# Altium PCB Electronic_dc_load_v2.PcbDoc (part 1 of 2)
Units mil, origin at the board's own origin, x right, y up, seen from the top; angles counter-clockwise.
Board outline 20669.29 x 4035.43 mil, 2 copper layers (Top Layer, Bottom Layer); 130 components, 99 nets, 414 pads, 0 vias.
Unrouted connection lines stored in the file: 291.
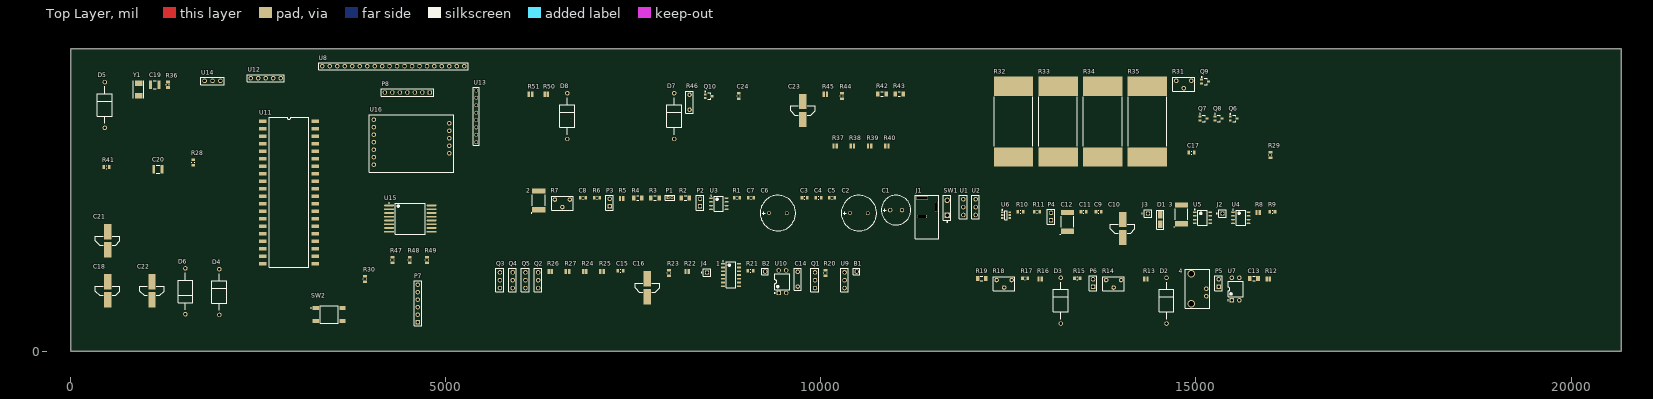
[diagram p0: Top Layer view]
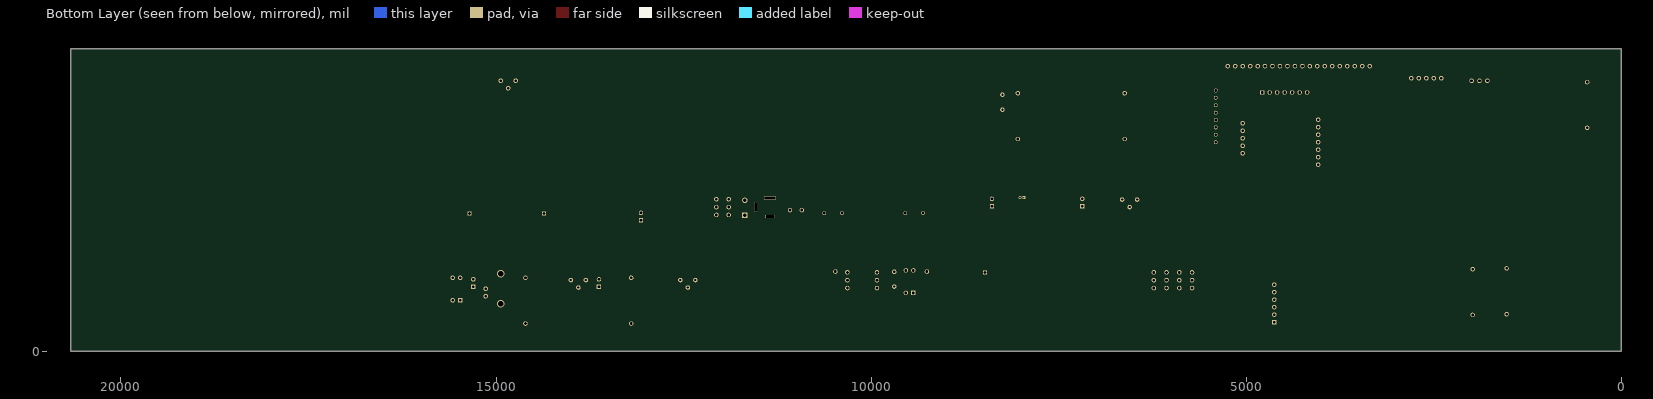
[diagram p1: Bottom Layer view, seen from below]

## Layer stack, top to bottom
Top Solder: solder mask 0.4, Solder Resist, Dk 3.5
Top Layer: signal copper 1.4
Dielectric 1: dielectric 12.6, FR-4, Dk 4.8
Bottom Layer: signal copper 1.4
Bottom Solder: solder mask 0.4, Solder Resist, Dk 3.5

## Board outline
0,0 20669.29,0 20669.29,4035.43 0,4035.43

## Design rules (kind name [scope] priority, off if disabled: settings)
Clearance [All] p1: gap=10 ignorepadtopadclearanceinfootprint=FALSE except(0: Arc-Hole Track-Hole SMDPad-Hole THPad-Hole Via-Hole Fill-Hole Poly-Hole Region-Hole Text-Hole)
PolygonConnect [All] p1: connectstyle=Relief reliefconductorwidth=10 reliefentries=4 polygonreliefangle="90 Angle" airgapwidth=10
RoomDefinition electronic_dc_load_v1 [InComponentClass('electronic_dc_load_v1')] p1: confinementstyle=ConfineIn formatcopy=TRUE lockcomponents=FALSE outline 0,0 20669.29,0 20669.29,4035.43 0,4035.43
RoutingVias [All] p1: holewidth=28 width=50 viastyle="Through Hole" minholewidth=28 minwidth=50 maxholewidth=28 maxwidth=50
SolderMaskExpansion [All] p1: expansion=4 istentingtop=FALSE
Width [All] p1: maxlimit=10 minlimit=10 preferedwidth=10
30 further rules are at their usual default settings.

## Components (designator, comment, footprint, x,y, rotation, side; value= is the part's Value field where it differs from the comment)
1 "AD8630" SOIC127P600X265-14N 8801.57,1020.39 r0 top
2 "100uF Tant." "CAPCP7343X24N-100uf Tant." 6238.58,2015 r90 top
3 "100uF Tant." "CAPCP7343X24N-100uf Tant." 14807.8,1827.8 r90 top
4 "031-71052" PNC-031-71052 15137.95,736.97 r90 top
B1 "BANANA JACK" TP 10476.57,1065.39 r0 top
B2 "BANANA JACK" TP 9256.57,1065.39 r0 top
C1 "47μF" Capacitor-47uf 10923.58,1885 r0 top
C2 "470μF" Capacitor-470uf 10388.58,1845 r0 top
C3 "0.1uF" RESC2012X06N 9783.58,2050 r0 top
C4 "0.1uF" RESC2012X06N 9968.58,2050 r0 top
C5 "0.1uF" RESC2012X06N 10148.58,2050 r0 top
C6 "220μF" Capacitor-470uf 9308.58,1845 r0 top
C7 "0.1uF" RESC2012X06N 9068.58,2050 r0 top
C8 "0.1uF" RESC2012X06N 6828.58,2050 r0 top
C9 "0.1uF" RESC2012X06N 13702.8,1862.8 r0 top
C10 "100uF Elect." CAPAE9183X102M 14022.8,1637.8 r90 top
C11 "0.1uF" RESC2012X06N 13502.8,1862.8 r0 top
C12 "100uF Tant." "CAPCP7343X24N-100uf Tant." 13287.8,1727.8 r90 top
C13 "1uF" RESC3216X06N 15772.95,971.97 r0 top
C14 "1nf" R82EC1100AA50J 9691.57,865.39 r90 top
C15 "0.1uF" RESC2012X06N 7326.57,1075.39 r0 top
C16 "100uF Elect." CAPAE9183X102M 7686.57,850.39 r90 top
C17 "0.1uF" RESC2012X06N 14941.77,2650.2 r0 top
C18 "100uF Elect." CAPAE9183X102M 492.13,809.06 r90 top
C19 "22pF" CAPC3028X26N 1119.33,3556.22 r0 top
C20 "22pF" CAPC3028X26N 1162.76,2427.28 r0 top
C21 "100uF Elect." CAPAE9183X102M 492.13,1476.38 r90 top
C22 "100uF Elect." CAPAE9183X102M 1082.68,809.06 r90 top
C23 "100uF Elect." CAPAE9183X102M 9759.33,3212.6 r90 top
C24 "0.1uF" RESC2012X06N 8904.33,3407.6 r90 top
D1 "15-21SURC/S530-A3/TR8" Diode 14522.8,1757.8 r90 top
D2 "D" "Diode_Through hole" 14607.95,371.97 r90 top
D3 "D" "Diode_Through hole" 13197.95,371.97 r90 top
D4 "D" "Diode_Through hole" 1981.3,487.2 r90 top
D5 "D" "Diode_Through hole" 454.33,2981.22 r90 top
D6 "D" "Diode_Through hole" 1528.54,1107.28 r270 top
D7 "D" "Diode_Through hole" 8044.33,2832.6 r90 top
D8 "D" "Diode_Through hole" 6619.33,2832.6 r90 top
J1 "Power jack" "DC jack" 11348.58,1800 r90 top
J2 "TSW-101-24-T-S" SAMTEC_TSW-101-24-T-S 15352.8,1837.8 r0 top
J3 "TSW-101-24-T-S" SAMTEC_TSW-101-24-T-S 14357.8,1837.8 r0 top
J4 "TSW-101-24-T-S" SAMTEC_TSW-101-24-T-S 8481.57,1050.39 r0 top
P1 "MHDR1X2" MHDR1X2 7963.58,2050 r0 top
P2 "Header 2" HDR1X2 8388.58,1935 r90 top
P3 "Header 2" HDR1X2 7183.58,1935 r90 top
P4 "Header 2" HDR1X2 13067.8,1747.8 r90 top
P5 "Header 2" HDR1X2 15302.95,861.97 r90 top
P6 "Fan" HDR1X2 13627.95,861.97 r90 top
P7 "Pickit" HDR1X6 4625.98,390.55 r90 top
P8 "Header 7" HDR1X7 4787.2,3452.76 r180 top
Q1 "STP55NF06L" TO-220-3 9921.57,845.39 r90 top
Q2 "STP55NF06L" TO-220-3 6231.57,845.39 r90 top
Q3 "STP55NF06L" TO-220-3 5721.57,845.39 r90 top
Q4 "STP55NF06L" TO-220-3 5891.57,845.39 r90 top
Q5 "STP55NF06L" TO-220-3 6061.57,845.39 r90 top
Q6 "BC846BWT1G" SOT65P245X110-3N 15503.43,3107.32 r0 top
Q7 "BC846BWT1G" SOT65P245X110-3N 15098.43,3107.32 r0 top
Q8 "BC846BWT1G" SOT65P245X110-3N 15298.43,3107.32 r0 top
Q9 "BC846BWT1G" SOT65P245X110-3N 15122.4,3599.45 r0 top
Q10 "BC846BWT1G" SOT65P245X110-3N 8504.33,3402.6 r0 top
R1 "10kR" RESC2012X06N 8883.58,2050 r0 top
R2 "1M" RESC3216X06N 8193.58,2045 r0 top
R3 "1M" RESC3216X06N 7788.58,2045 r0 top
R4 "1M" RESC3216X06N 7558.58,2045 r0 top
R5 "100R" RESC1418X06N 7343.58,2040 r0 top
R6 "10k" RESC2012X06N 7013.58,2050 r0 top
R7 "20k" 3296Y_Trimmer 6453.58,2025 r0 top
R8 "2.2KR" RESC1418X06N 15827.8,1852.8 r0 top
R9 "10kR" RESC2012X06N 16017.8,1862.8 r0 top
R10 "10k" RESC2012X06N 12662.8,1862.8 r0 top
R11 "10k" RESC2012X06N 12882.8,1862.8 r0 top
R12 "100R" RESC1418X06N 15962.95,966.97 r0 top
R13 "47KR" RESC1418X06N 14332.95,966.97 r0 top
R14 "500k" 3296Y_Trimmer 13802.95,951.97 r0 top
R15 "10k" RESC2012X06N 13417.95,976.97 r0 top
R16 "2.2KR" RESC1418X06N 12922.95,966.97 r0 top
R17 "1kR" RESC2012X06N 12722.95,976.97 r0 top
R18 "20k" 3296Y_Trimmer 12342.95,951.97 r0 top
R19 "4.7M" RESC3216X06N 12142.95,971.97 r0 top
R20 "1kR" RESC2012X06N 10061.57,1045.39 r90 top
R21 "1kR" RESC2012X06N 9061.57,1075.39 r0 top
R22 "100R" RESC1418X06N 8216.57,1065.39 r0 top
R23 "10k" RESC2012X06N 7976.57,1045.39 r90 top
R24 "2.2KR" RESC1418X06N 6851.57,1065.39 r0 top
R25 "2.2KR" RESC1418X06N 7081.57,1065.39 r0 top
R26 "2.2KR" RESC1418X06N 6391.57,1065.39 r0 top
R27 "2.2KR" RESC1418X06N 6621.57,1065.39 r0 top
R28 "1kR" RESC2012X06N 1633.19,2518.82 r90 top
R29 "1kR" RESC2012X06N 15991.77,2620.2 r90 top
R30 "10kR" RESC2012X06N 3923.9,965.67 r90 top
R31 "200R" 3296Y_Trimmer 14737.4,3609.45 r0 top
R32 "1R" RESC296132X130N 12567.4,3064.45 r90 top
R33 "1R" RESC296132X130N 13162.4,3064.45 r90 top
R34 "1R" RESC296132X130N 13757.4,3064.45 r90 top
R35 "1R" RESC296132X130N 14352.4,3064.45 r90 top
R36 "1kR" RESC2012X06N 1294.33,3556.22 r90 top
R37 "270KR" RESC1418X06N 10188.98,2738.62 r0 top
R38 "270KR" RESC1418X06N 10418.98,2738.62 r0 top
R39 "270KR" RESC1418X06N 10648.98,2738.62 r0 top
R40 "270KR" RESC1418X06N 10878.98,2738.62 r0 top
R41 "1kR" RESC2012X06N 477.76,2457.28 r0 top
R42 "1M" RESC3216X06N 10814.33,3432.6 r0 top
R43 "1M" RESC3216X06N 11044.33,3432.6 r0 top
R44 "10k" RESC2012X06N 10279.33,3407.6 r90 top
R45 "100R" RESC1418X06N 10059.33,3427.6 r0 top
R46 "0.1R" "TO-220 - 2 PIN" 8249.33,3222.6 r90 top
R47 "10kR" RESC2012X06N 4288.66,1217.64 r90 top
R48 "10kR" RESC2012X06N 4518.66,1217.64 r90 top
R49 "10kR" RESC2012X06N 4748.66,1217.64 r90 top
R50 "330KR" RESC1418X06N 6339.33,3427.6 r0 top
R51 "100KR" RESC1418X06N 6129.33,3427.6 r0 top
SW1 "SW-SPST" SPST-2 11683.58,1915 r90 top
SW2 "FSM4JSMA" TE_FSM4JSMA 3444.88,492.13 r0 top
U1 "LM7812CT" TO-220-3 11898.58,1820 r90 top
U2 "LM7805CT" TO-220-3 12063.58,1820 r90 top
U3 "OPA277" SOIC127P600X265-8L 8638.58,1970 r0 top
U4 "LM431ACMX" SOIC127P600X265-8L 15597.8,1782.8 r0 top
U5 "LTC1046" SOIC127P600X265-8L 15087.8,1782.8 r0 top
U6 "SN74LVC2G14DBVR" SOT95P245X110-6N 12467.8,1817.8 r0 top
U7 "Optoisolator1" DIP-4 15527.95,831.97 r90 top
U8 "GLCD" "20 PIN- 2.54mm" 5246.26,3804.13 r180 top
U9 "MBR41H100CTG" TO-220-3 10316.57,845.39 r90 top
U10 "Optoisolator1" DIP-4 9486.57,930.39 r90 top
U11 "PIC16F1779" "DIP40 - duplicate" 2559.06,3070.08 r0 top
U12 "Rotary Encoder Module" "5 PIN-2.54mm" 2398.82,3642.72 r0 top
U13 "27899" "8 pin component_2.54mm pitch" 5405.51,2790.35 r90 top
U14 "LM35DZ" TO-220-3 1994.49,3608.27 r180 top
U15 "PCF8574ADWR" SOIC127P1650X265-16L 4527.56,1771.65 r0 top
U16 "DS1307-Tiny RTC Modul" "DS1307-Tiny RTC Modul" 5047.32,3041.54 r180 top
Y1 "ABM7-16.000MHZ-D2Y-T" XTAL_ABM7-16.000MHZ-D2Y-T 904.33,3491.22 r90 top

## Footprints (in the part's own frame and the unit in brackets; to place one, negate y for a bottom-side part, rotate by r counter-clockwise, add the part's x,y. Pads: shape width x height; smd on the part's side, far side on the other; paste and mask are expansions set on the pad)
"5 PIN-2.54mm" [mil]
  round 60 hole 35.43: 1(0,0) 2(100,0) 3(200,0) 4(300,0) 5(400,0)
  silkscreen extent -47,-49 450,48
"8 pin component_2.54mm pitch" [mm]
  round 1.3 hole 0.9: 1(0,0) 2(2.5,0) 3(5,0) 4(7.5,0) 5(10,0) 6(12.5,0) 7(15,0) 8(17.5,0)
  silkscreen extent -1.1,-0.97 18.6,1
"20 PIN- 2.54mm" [mil]
  round 60 hole 35.43: 1(0,0) 2(100,0) 3(200,0) 4(300,0) 5(400,0) 6(496.85,0) 7(596.85,0) 8(696.85,0) 9(796.85,0) 10(896.85,0) 11(996.85,0) 12(1095.28,0) 13(1193.7,0) 14(1293.7,0) 15(1393.7,0) 16(1493.7,0) 17(1593.7,0) 18(1693.7,0) 19(1793.7,0) 20(1893.7,0)
  silkscreen extent -52,-45 1942,46
3296Y_Trimmer [mil] "3296Y_Trimmer"
  round 60 hole 30: 1(0,0) 2(100,-100) 3(200,0)
  silkscreen extent -44,-143 244,46
Capacitor-47uf [mm]
  round 1.5 hole 0.9: 1(0,0) 2(4,0)
  silkscreen extent -3,-5 7,5
Capacitor-470uf [mm]
  round 1.3 hole 0.9: 1(0,0) 2(6,0)
  silkscreen extent -3,-6 9,6
CAPAE9183X102M [mm] "Aluminum Electrolytic Capacitor, Body 3.10x8.30x10.20mm, IPC Low Density"
  rect 5.15x2.45 smd: 1(-3.05,0) 2(3.05,0)
  silkscreen extent -1.55,-4.15 1.55,4.15, body extent -2.25,-4.15 2.25,4.15, height 10.2
CAPC3028X26N [mm] "Chip Capacitor, 2-Leads, Body 2.98x2.79mm, IPC Medium Density"
  rect 1x2.95 smd: 1(-1.425,0) 2(1.425,0)
  silkscreen extent -0.55,-1.37 0.55,1.38, body extent -1.49,-1.39 1.49,1.4, height 2.59
"CAPCP7343X24N-100uf Tant." [mm] "Chip Capacitor, 2-Leads, Body 7.30x4.30mm, IPC Medium Density"
  rect 1.8x4.45 smd: 1(-3.175,0) 2(3.175,0)
  silkscreen extent -4.34,-2.12 1.9,2.49, body extent -3.65,-2.15 3.65,2.15, height 2.4
"DC jack" [mm] "KLDHCX-0202-AC-1"
  rect 1.2x3.7 hole 3.5 slot 1 at 0 deg: 1(6.25,0)
  rect 1x3.2 hole 3 slot 0.8 at 0 deg: 2(0,0)
  rect 3.2x1 hole 3 slot 0.8 at 90 deg: 3(3.25,-4.8)
  silkscreen extent -7.49,-5.72 7.14,2.24
Diode [mm]
  rect 2.5x1.6 smd: 1(-1.6,0) 2(1.6,0)
  silkscreen extent -3.33,-1.24 3.63,1.19
"Diode_Through hole" [mm]
  round 1.5 hole 0.9: A(0,0) K(15.5,0)
  silkscreen extent 1.5,-2.5 14,2.5
"DIP40 - duplicate" [mm]
  rect 2.54x1.27 smd: 1(0,0) 2(0,-2.54) 3(0,-5.08) 4(0,-7.62) 5(0,-10.16) 6(0,-12.7) 7(0,-15.24) 8(0,-17.78) 9(0,-20.32) 10(0,-22.86) 11(0,-25.4) 12(0,-27.94) 13(0,-30.48) 14(0,-33.02) 15(0,-35.56) 16(0,-38.1) 17(0,-40.64) 18(0,-43.18) 19(0,-45.72) 20(0,-48.26) 21(17.78,-48.26) 22(17.78,-45.72) 23(17.78,-43.18) 24(17.78,-40.64) 25(17.78,-38.1) 26(17.78,-35.56) 27(17.78,-33.02) 28(17.78,-30.48) 29(17.78,-27.94) 30(17.78,-25.4) 31(17.78,-22.86) 32(17.78,-20.32) 33(17.78,-17.78) 34(17.78,-15.24) 35(17.78,-12.7) 36(17.78,-10.16) 37(17.78,-7.62) 38(17.78,-5.08) 39(17.78,-2.54)
  rect 2.5x1.27 smd: 40(17.78,0)
  silkscreen extent 2.16,-49.53 15.62,1.27
DIP-4 [mm] "DIP; 4 Leads; Row Spacing 7.62 mm; Pitch 2.54 mm"
  rect 1.5x1.5 hole 0.9: 1(-3.81,1.27)
  round 1.5 hole 0.9: 2(-3.81,-1.27) 3(3.81,-1.27) 4(3.81,1.27)
  silkscreen extent -3.93,-2.55 2.65,2.69, body extent -3.15,-2.5 3.15,2.5, height 5.6
"DS1307-Tiny RTC Modul" [mil]
  round 60 hole 35.43: 1(1006,-49.21) 2(1005.98,50.79) 3(1005.98,150.79) 4(1005.98,250.79) 5(1005.98,350.79) 6(1005.98,450.79) 7(1005.98,550.79) 8(0,400) 9(0,300) 10(0,200) 11(0,100) 12(0,0)
  silkscreen extent -57,-117 1066,654
HDR1X2 [mm] "Connector; Header; 2 Position"
  rect 1.5x1.5 hole 0.9: 1(0,0)
  round 1.5 hole 0.9: 2(2.54,0)
  silkscreen extent -1.27,-1.27 3.81,1.27
HDR1X6 [mm] "Connector; Header; 6 Position"
  rect 1.5x1.5 hole 0.9: 1(0,0)
  round 1.5 hole 0.9: 2(2.54,0) 3(5.08,0) 4(7.62,0) 5(10.16,0) 6(12.7,0)
  silkscreen extent -1.27,-1.27 13.97,1.27
HDR1X7 [mm] "Connector; Header; 7 Position"
  rect 1.5x1.5 hole 0.9: 1(0,0)
  round 1.5 hole 0.9: 2(2.54,0) 3(5.08,0) 4(7.62,0) 5(10.16,0) 6(12.7,0) 7(15.24,0)
  silkscreen extent -1.27,-1.27 16.51,1.27
MHDR1X2 [mm] "Connector; Header; 2 Position"
  rect 1x1 hole 0.6: 1(0,0)
  round 1 hole 0.6: 2(1.27,0)
  silkscreen extent -0.9,-0.9 2.17,0.9
PNC-031-71052 [mm]
  round 1.524 hole 0.9: 1(2.54,0) 2(0,0)
  round 2.5 hole 1.8: 3(7.62,5.08) 4(-2.54,5.08)
  silkscreen extent -4.06,-1.14 9.19,7.06
R82EC1100AA50J [mil]
  round 60 hole 30: 1(0,0) 2(196.85,0)
  silkscreen extent -46,-44 244,45
RESC1418X06N [mm] "Chip Resistor, 2-Leads, Body 1.45x1.75mm, IPC Medium Density"
  rect 0.8x1.8 smd: 1(-0.55,0) 2(0.55,0)
  body extent -0.72,-0.87 0.73,0.87, height 0.6
RESC2012X06N [mm] "Chip Resistor, 2-Leads, Body 2.00x1.25mm, IPC Medium Density"
  rect 0.9x1.3 smd: 1(-0.925,0) 2(0.925,0)
  silkscreen extent -0.1,-0.55 0.1,0.55, body extent -1,-0.63 1,0.63, height 0.6
RESC3216X06N [mm] "Chip Resistor, 2-Leads, Body 3.20x1.60mm, IPC Medium Density"
  rect 1.2x1.65 smd: 1(-1.375,0) 2(1.375,0)
  silkscreen extent -0.4,-0.72 0.4,0.72, body extent -1.6,-0.8 1.6,0.8, height 0.55
RESC296132X130N [mm] "Chip Resistor, 2-Leads, Body 29.59x13.21mm, IPC Medium Density"
  rect 6.45x13.3 smd: 1(-11.975,0) 2(11.975,0)
  silkscreen extent -8.35,-6.55 8.35,6.55, body extent -14.79,-6.61 14.79,6.6, height 13
SAMTEC_TSW-101-24-T-S [mm]
  rect 1.37x1.37 hole 1.02: 01(0,0)
  silkscreen extent -2.02,-1.27 1.27,1.27
SOIC127P600X265-8L [mm] "SOIC, 8-Leads, Body 4.90x3.90mm, Pitch 1.27mm, IPC High Density"
  oval 1.25x0.55 smd: 1(-2.625,1.905) 2(-2.625,0.635) 3(-2.625,-0.635) 4(-2.625,-1.905) 5(2.625,-1.905) 6(2.625,-0.635) 7(2.625,0.635) 8(2.625,1.905)
  silkscreen extent -2.75,-2.5 1.6,2.85, body extent -2,-2.5 2,2.5, height 2.65
SOIC127P600X265-14N [mm] "SOIC, 14-Leads, Body 8.65x3.91mm, Pitch 1.27mm, IPC Medium Density"
  rect 1.45x0.6 smd: 1(-2.725,3.81) 2(-2.725,2.54) 3(-2.725,1.27) 4(-2.725,0) 5(-2.725,-1.27) 6(-2.725,-2.54) 7(-2.725,-3.81) 8(2.725,-3.81) 9(2.725,-2.54) 10(2.725,-1.27) 11(2.725,0) 12(2.725,1.27) 13(2.725,2.54) 14(2.725,3.81)
  silkscreen extent -2.85,-4.4 1.6,4.78, body extent -2,-4.4 2,4.4, height 2.65
SOIC127P1650X265-16L [mm] "SOIC, 16-Leads, Body 10.30x7.50mm, Pitch 1.27mm, IPC High Density"
  oval 3.4x0.55 smd: 1(-7.2,4.445) 2(-7.2,3.175) 3(-7.2,1.905) 4(-7.2,0.635) 5(-7.2,-0.635) 6(-7.2,-1.905) 7(-7.2,-3.175) 8(-7.2,-4.445) 9(7.2,-4.445) 10(7.2,-3.175) 11(7.2,-1.905) 12(7.2,-0.635) 13(7.2,0.635) 14(7.2,1.905) 15(7.2,3.175) 16(7.2,4.445)
  silkscreen extent -7.32,-5.25 5.1,5.39, body extent -3.7,-5.25 3.7,5.25, height 2.65
SOT65P245X110-3N [mm] "SOT23, 3-Leads, Body 2.00x2.45mm, Pitch 0.65mm, IPC Medium Density"
  rect 1x0.7 smd: 1(-1.175,0.65) 2(-1.175,-0.65) 3(1.175,0)
  silkscreen extent -1.3,-1.1 0.67,1.67, body extent -0.67,-1.1 0.67,1.1, height 1.1
SOT95P245X110-6N [mm] "SOT23, 6-Leads, Body 2.90x2.45mm, Pitch 0.95mm, IPC Medium Density"
  rect 0.8x0.6 smd: 1(-1.275,0.95) 2(-1.275,0) 3(-1.275,-0.95) 4(1.275,-0.95) 5(1.275,0) 6(1.275,0.95)
  silkscreen extent -1.4,-1.5 0.5,1.92, body extent -0.88,-1.5 0.87,1.5, height 1.1
SPST-2 [mm] "Switch; 2 Leads"
  rect 1.85x1.85 hole 1.1: 1(-2.54,0)
  round 1.85 hole 1.1: 2(2.54,0)
  silkscreen extent -4.89,-1.27 4.28,1.27
TE_FSM4JSMA [mm]
  rrect15% 2.1x1.38 smd: 1(-4.55,2.24) 2(4.55,2.24) 3(-4.55,-2.24) 4(4.55,-2.24)
  silkscreen extent -6.25,-3 3,3, body extent -3,-5 3,5, height 4.98
"TO-220 - 2 PIN" [mil]
  round 60 hole 30: 1(0,0) 2(200,0)
  silkscreen extent -48,-48 249,48
TO-220-3 [mil]
  round 60 hole 37.8: 1(0,0) 2(104.72,0) 3(209.45,0)
  silkscreen extent -51,-49 262,54
TP [mil]
  round 60 hole 35.43: 1(0,0)
  silkscreen extent -43,-43 43,43
XTAL_ABM7-16.000MHZ-D2Y-T [mm]
  rect 1.9x2.6 smd: 1(-2.15,0) 2(2.15,0)
  silkscreen extent -3,-1.75 3,1.75

## Part data
1: "ANALOG DEVICES - AD8630ARUZ - Operational Amplifier, Quad, 4 Amplifier, 2.5 MHz, 1 V/µs, 2.7V to 5V, TSSOP, 14 Pins", Case/Package=TSSOP, Input Bias Current=100pA, Input Capacitance=10pF, Input Offset Voltage (Vos)=2.5uV, Manufacturer="Analog Devices", Manufacturer Part Number=AD8630ARUZ, Max Dual Supply Voltage=2.5V, Max Operating Temperature=125°C, Max Supply Current=4.4mA, Max Supply Voltage=5V, Min Dual Supply Voltage=1.35V, Min Operating Temperature=-40°C, Min Supply Voltage=2.7V, Operating Supply Voltage=3V, Output Current per Channel=30mA, Package Quantity=96, Power Supply Rejection Ratio (PSRR)=130dB, Quiescent Current=1.1mA, Supplier Part Number 1=19M0982, Voltage Gain=145dB, -3db Bandwidth=2.5MHz, Bandwidth=2.5MHz, Category="Amplifiers - Op Amps, Buffer, Instrumentation", Common Mode Rejection Ratio=140dB, ComponentLink1Description=https://datasheet.ciiva.com/15130/getdatasheetpartid-63998-15130068.pdf?src-supplier=Verical, ComponentLink1URL=https://datasheet.ciiva.com/15130/getdatasheetpartid-63998-15130068.pdf?src-supplier=Verical, ComponentLink2Description=https://datasheet.ciiva.com/26849/ad8630aruz-26849452.pdf?src-supplier=IIIC, ComponentLink2URL=https://datasheet.ciiva.com/26849/ad8630aruz-26849452.pdf?src-supplier=IIIC, ComponentLink3Description=https://datasheet.ciiva.com/1795/ad8628-8629-8630-1795026.pdf?src-supplier=Digi-Key, ComponentLink3URL=https://datasheet.ciiva.com/1795/ad8628-8629-8630-1795026.pdf?src-supplier=Digi-Key, ComponentLink4Description=https://datasheet.ciiva.com/2976/ad8628-8629-8630-2976039.pdf?src-supplier=Avnet, ComponentLink4URL=https://datasheet.ciiva.com/2976/ad8628-8629-8630-2976039.pdf?src-supplier=Avnet, ComponentLink5Description=https://datasheet.ciiva.com/15374/ad8628-8629-8630-249176-15374283.pdf?src-supplier=Mouser, ComponentLink5URL=https://datasheet.ciiva.com/15374/ad8628-8629-8630-249176-15374283.pdf?src-supplier=Mouser, ComponentLink6Description=https://datasheet.ciiva.com/1135/1852416-1135902.pdf?src-supplier=Element14, ComponentLink6URL=https://datasheet.ciiva.com/1135/1852416-1135902.pdf?src-supplier=Element14, ComponentLink7Description=https://datasheet.ciiva.com/48710/001249419-da-01-en-ic-opamp-chopper-ad8630aruz-tssop-14-adi-48710044.pdf?src-supplier=Conrad, ComponentLink7URL=https://datasheet.ciiva.com/48710/001249419-da-01-en-ic-opamp-chopper-ad8630aruz-tssop-14-adi-48710044.pdf?src-supplier=Conrad, Contact Plating=Tin,Matte, Gain Bandwidth Product=2.5MHz, Height=1mm, Lead Free="Contains Lead", Length=5mm, Number of Amplifiers=4, Number of Channels=4, Number of Circuits=4, Number of Elements=4, Number of Pins=14, Operating Supply Current=4.4mA, Packaging=Rail/Tube, Radiation Hardening=No, REACH SVHC="No SVHC", RoHS=Yes, RoHS Compliant=Yes, Series=-, Slew Rate=1V/µs, Supplier 1=Newark, Unity Gain Bandwidth Product=2.5MHz, Width=4.4mm
2 3 C12: "AVX - TPSE107K020R0150 - Surface Mount Tantalum Capacitor, 100 &#181;F, 20 V, 2917 [7343 Metric], TPS Series, &#177; 10%, -55 &#176;C", Capacitance=100uF, Case Code (Imperial)=2917, Case Code (Metric)=7343, Dielectric Material=Tantalum, ESR (Equivalent Series Resistance)=150mR, Leakage Current=20uA, Manufacturer="Kyocera AVX", Manufacturer Part Number=TPSE107K020R0150, Max Operating Temperature=125°C, Min Operating Temperature=-55°C, Package Quantity=1, Ripple Current=420uA, Supplier Part Number 1=478-1795-1-ND, Tolerance=10%, Voltage=20V, Case/Package=2917, Category="Tantalum Capacitors", ComponentLink1Description=https://datasheet.ciiva.com/26944/getdatasheetpartid-140515-26944833.pdf?src-supplier=Verical, ComponentLink1URL=https://datasheet.ciiva.com/26944/getdatasheetpartid-140515-26944833.pdf?src-supplier=Verical, ComponentLink2Description=https://datasheet.ciiva.com/36178/2038926-36178963.pdf?src-supplier=Jameco, ComponentLink2URL=https://datasheet.ciiva.com/36178/2038926-36178963.pdf?src-supplier=Jameco, ComponentLink3Description=https://datasheet.ciiva.com/11794/0900766b80962b61-11794582.pdf?src-supplier=RSComponents, ComponentLink3URL=https://datasheet.ciiva.com/11794/0900766b80962b61-11794582.pdf?src-supplier=RSComponents, ComponentLink4Description=https://datasheet.ciiva.com/29121/806605-da-01-en-smd-tantal100uf-20v-10-0-150r-400st-29121566.pdf?src-supplier=Conrad, ComponentLink4URL=https://datasheet.ciiva.com/29121/806605-da-01-en-smd-tantal100uf-20v-10-0-150r-400st-29121566.pdf?src-supplier=Conrad, ComponentLink5Description=https://datasheet.ciiva.com/265/tps-265429.pdf?src-supplier=Digi-Key, ComponentLink5URL=https://datasheet.ciiva.com/265/tps-265429.pdf?src-supplier=Digi-Key, ComponentLink6Description=https://datasheet.ciiva.com/265/tps-265430.pdf?src-supplier=Digi-Key, ComponentLink6URL=https://datasheet.ciiva.com/265/tps-265430.pdf?src-supplier=Digi-Key, ComponentLink7Description=https://datasheet.ciiva.com/12911/tps-23028-12911414.pdf?src-supplier=Mouser, ComponentLink7URL=https://datasheet.ciiva.com/12911/tps-23028-12911414.pdf?src-supplier=Mouser, ComponentLink8Description=https://datasheet.ciiva.com/265/tps-265431.pdf?src-supplier=Digi-Key, ComponentLink8URL=https://datasheet.ciiva.com/265/tps-265431.pdf?src-supplier=Digi-Key, ComponentLink9Description=https://datasheet.ciiva.com/11231/tps-11231351.pdf?src-supplier=Avnet, ComponentLink9URL=https://datasheet.ciiva.com/11231/tps-11231351.pdf?src-supplier=Avnet, ComponentLink10Description=https://datasheet.ciiva.com/14609/70001047-14609387.pdf?src-supplier=Allied+Electronics, ComponentLink10URL=https://datasheet.ciiva.com/14609/70001047-14609387.pdf?src-supplier=Allied+Electronics, ComponentLink11Description=https://datasheet.ciiva.com/16501/tps-16501660.pdf?src-supplier=Future+Electronics, ComponentLink11URL=https://datasheet.ciiva.com/16501/tps-16501660.pdf?src-supplier=Future+Electronics, ComponentLink12Description=https://datasheet.ciiva.com/7720/1680477-7720766.pdf?src-supplier=Element14, ComponentLink12URL=https://datasheet.ciiva.com/7720/1680477-7720766.pdf?src-supplier=Element14, ComponentLink13Description=https://datasheet.ciiva.com/7720/1680477-7720767.pdf?src-supplier=Element14, ComponentLink13URL=https://datasheet.ciiva.com/7720/1680477-7720767.pdf?src-supplier=Element14, ComponentLink14Description=https://datasheet.ciiva.com/14591/70001047-14591823.pdf?src-supplier=Allied+Electronics, ComponentLink14URL=https://datasheet.ciiva.com/14591/70001047-14591823.pdf?src-supplier=Allied+Electronics, Construction=Flat, Depth=4.3mm, Dissipation Factor=6%, Features="General Purpose", Height=4.1mm, Height - Seated (Max)=0.169inch, Lead Free="Lead Free", Length=7.3mm, Mount="Surface Mount,PCB", Packaging="Tape and Reel", Polarity=Polar, Pricing 1="1=1.87000, 10=1.51200, 50=1.32000, 100=1.15500 (USD)", Radiation Hardening=No, REACH SVHC="No SVHC", RoHS=Yes, RoHS Compliant=Yes, Series=TPS, Stock 1=680, Supplier 1=Digi-Key, Termination=SMD/SMT, Voltage Rating=20V, Voltage Rating (DC)=20V, Weight=0.023634oz, Width=4.3mm
4: "Connector; RF; BNC; Rt. Angle; PCB Jack; Bulkhead Mnt; 75 Ohm; Nickel/Gold", Dielectric Material=PBT, Frequency=1GHz, Housing Color=Silver, Manufacturer=Amphenol, Max Operating Temperature=85°C, Min Operating Temperature=-55°C, Package Quantity=100, Supplier Part Number 1=ARF2869-ND, Voltage Rating=500V, Body Material=Zinc, Body Plating=Nickel, Category="RF / Coaxial Connectors", ComponentLink1Description=https://datasheet.ciiva.com/29191/c031-71052-29191970.pdf?src-supplier=Digi-Key, ComponentLink1URL=https://datasheet.ciiva.com/29191/c031-71052-29191970.pdf?src-supplier=Digi-Key, ComponentLink2Description=https://datasheet.ciiva.com/14568/70142399-14568714.pdf?src-supplier=Allied+Electronics, ComponentLink2URL=https://datasheet.ciiva.com/14568/70142399-14568714.pdf?src-supplier=Allied+Electronics, Connector Type=BNC,Socket, Contact Material=Bronze,Copper, Contact Plating=Gold, Fastening Type=Bayonet, Impedance=75R, Manufacturer Part Number=031-71052, Max Frequency=1GHz, Mount="Through Hole,Panel,Bulkhead,PCB", Orientation="Right Angle", Packaging=Bulk, Pricing 1="1=3.33000, 10=3.20000, 25=2.93320, 50=2.79980, 100=2.66640, 250=2.33312, 500=2.26644, 1000=1.93314, 2500=1.79982 (USD)", Radiation Hardening=No, RoHS=Yes, Stock 1=160, Supplier 1=Digi-Key, Termination=Solder
C1: "47μF 16V  electrolytic"
C2: "35V electrolytic"
C3 C4 C5 C7 C8 C9 C11 C15 C17 C24: "CAPACITOR PEN FILM 0.1UF, 100V, 10%, 1812, FULL REEL; Product Range:AEC-Q200 LDE Series; Capacitance:0.1 F; Capacitance Tolerance: 10%; Capacitor Dielectric Type:PEN (Polyethylene Naphthalate); Voltage Rating:100V; Lead Spacing:- ;RoHS Compliant: Yes", Capacitance=100nF, Case Code (Imperial)=1812, Case Code (Metric)=4532, Dielectric Material=Polyester, Manufacturer=KEMET, Manufacturer Part Number=LDEEC3100KA5N00, Max Operating Temperature=125°C, Min Operating Temperature=-55°C, Package Quantity=1, Supplier Part Number 1=399-5480-1-ND, Tolerance=10%, Voltage=100V, Voltage Rating (AC)=63V, Case/Package=1812, Category="Film Capacitors", ComponentLink1Description=https://datasheet.ciiva.com/17238/datasheetpn-ldeec3100ka5n00-17238771.pdf?src-supplier=Avnet+Europe, ComponentLink1URL=https://datasheet.ciiva.com/17238/datasheetpn-ldeec3100ka5n00-17238771.pdf?src-supplier=Avnet+Europe, Construction=Flat, Depth=3.3mm, Dissipation Factor=0.8%, Height=2.4mm, Height - Seated (Max)=0.094inch, Length=4.7mm, Mount="Surface Mount,PCB", Number of Pins=2, Packaging="Tape and Reel", Pricing 1="1=0.88000, 10=0.66600, 50=0.55300, 100=0.47620, 500=0.36868, 1000=0.31747 (USD)", Radiation Hardening=No, REACH SVHC="No SVHC", RoHS=Yes, RoHS Compliant=Yes, Series=LDE, Stock 1=2950, Supplier 1=Digi-Key, Termination=SMD/SMT, Voltage Rating=100V, Voltage Rating (DC)=100V, Width=3.2mm
C6: "220μF 25V  electrolytic"
C10 C16 C18 C21 C22 C23: "CAP ALUM 100UF 20% 50V SMD electrolytic", Capacitance=100uF, Case/Package=Radial, Leakage Current=50uA, Manufacturer=KEMET, Manufacturer Part Number=EDK107M050A9MAA, Max Operating Temperature=85°C, Min Operating Temperature=-40°C, Package Quantity=500, Ripple Current=165mA, Supplier Part Number 1=399-6672-1-ND, Tolerance=20%, Voltage Rating=50V, Category="Aluminum Electrolytic Capacitors", ComponentLink1Description=https://datasheet.ciiva.com/5363/kem-a4001-edk-535350-5363820.pdf?src-supplier=Mouser, ComponentLink1URL=https://datasheet.ciiva.com/5363/kem-a4001-edk-535350-5363820.pdf?src-supplier=Mouser, ComponentLink2Description=https://datasheet.ciiva.com/8032/1680956-8032398.pdf?src-supplier=Element14, ComponentLink2URL=https://datasheet.ciiva.com/8032/1680956-8032398.pdf?src-supplier=Element14, Construction=Cylindrical, Diameter=8mm, Dissipation Factor=12%, Height=10.2mm, Height - Seated (Max)=0.413inch, Length=10.2mm, Life (Hours)=2000Hour, Mount="Surface Mount", Packaging="Cut Tape", Pricing 1="1=0.74000, 10=0.52100, 50=0.39420, 100=0.34340 (USD)", Radiation Hardening=No, REACH SVHC="No SVHC", Ripple Current (AC)=165mA, RoHS=Yes, RoHS Compliant=Yes, Series=EDK, Stock 1=2832, Supplier 1=Digi-Key, Termination=SMD/SMT, Voltage Rating (DC)=50V
C13: "CAP TANT 1UF 35V 10% 1206", Case Code (Imperial)=1206, Case Code (Metric)=3216, Dielectric Material=Tantalum, ESR (Equivalent Series Resistance)=3R, Leakage Current=500nA, Manufacturer="Kyocera AVX", Manufacturer Part Number=TPSA105K035R3000, Max Operating Temperature=125°C, Min Operating Temperature=-55°C, Package Quantity=1, Ripple Current=63uA, Supplier Part Number 1=478-3336-1-ND, Tolerance=10%, Voltage=35V, Capacitance=1uF, Case/Package=1206, Category="Tantalum Capacitors", ComponentLink1Description=https://datasheet.ciiva.com/11794/0900766b8070be5f-11794565.pdf?src-supplier=RSComponents, ComponentLink1URL=https://datasheet.ciiva.com/11794/0900766b8070be5f-11794565.pdf?src-supplier=RSComponents, ComponentLink2Description=https://datasheet.ciiva.com/263/tps-263817.pdf?src-supplier=Digi-Key, ComponentLink2URL=https://datasheet.ciiva.com/263/tps-263817.pdf?src-supplier=Digi-Key, ComponentLink3Description=https://datasheet.ciiva.com/7832/1680477-7832618.pdf?src-supplier=Element14, ComponentLink3URL=https://datasheet.ciiva.com/7832/1680477-7832618.pdf?src-supplier=Element14, ComponentLink4Description=https://datasheet.ciiva.com/7832/1441576-7832619.pdf?src-supplier=Element14, ComponentLink4URL=https://datasheet.ciiva.com/7832/1441576-7832619.pdf?src-supplier=Element14, ComponentLink5Description=https://datasheet.ciiva.com/7832/1441576-7832620.pdf?src-supplier=Element14, ComponentLink5URL=https://datasheet.ciiva.com/7832/1441576-7832620.pdf?src-supplier=Element14, ComponentLink6Description=https://datasheet.ciiva.com/14602/70001047-14602621.pdf?src-supplier=Allied+Electronics, ComponentLink6URL=https://datasheet.ciiva.com/14602/70001047-14602621.pdf?src-supplier=Allied+Electronics, ComponentLink7Description=https://datasheet.ciiva.com/14598/70001047-14598933.pdf?src-supplier=Allied+Electronics, ComponentLink7URL=https://datasheet.ciiva.com/14598/70001047-14598933.pdf?src-supplier=Allied+Electronics, ComponentLink8Description=https://datasheet.ciiva.com/263/tps-263816.pdf?src-supplier=Digi-Key, ComponentLink8URL=https://datasheet.ciiva.com/263/tps-263816.pdf?src-supplier=Digi-Key, ComponentLink9Description=https://datasheet.ciiva.com/263/tps-263818.pdf?src-supplier=Digi-Key, ComponentLink9URL=https://datasheet.ciiva.com/263/tps-263818.pdf?src-supplier=Digi-Key, ComponentLink10Description=https://datasheet.ciiva.com/46438/packmark-46438479.pdf?src-supplier=Element14, ComponentLink10URL=https://datasheet.ciiva.com/46438/packmark-46438479.pdf?src-supplier=Element14, Construction=Flat, Depth=1.6mm, Dissipation Factor=4%, Features="General Purpose", Height=1.6mm, Height - Seated (Max)=0.071inch, Lead Free="Lead Free", Length=3.2mm, Mount="Surface Mount,PCB", Number of Pins=2, Packaging="Tape and Reel", Polarity=Polar, Pricing 1="1=0.57000, 10=0.40600, 50=0.30680, 100=0.26730, 500=0.19800, 1000=0.16830 (USD)", Radiation Hardening=No, REACH SVHC="No SVHC", RoHS=Yes, RoHS Compliant=Yes, Series=TPS, Stock 1=11457, Supplier 1=Digi-Key, Termination=SMD/SMT, Voltage Rating=35V, Voltage Rating (DC)=35V, Width=1.6mm
C14: "CAP FILM 1000PF 5% 100VDC RADIAL", Capacitance=1nF, Case/Package=Radial, Dielectric=PET, Dielectric Material=Polyester, Insulation Resistance=30R, Manufacturer=KEMET, Manufacturer Part Number=R82EC1100AA50J, Max Operating Temperature=105°C, Min Operating Temperature=-55°C, Package Quantity=3000, Ratings=AEC-Q200, Supplier Part Number 1=399-5871-ND, Tolerance=5%, Voltage=100V, Voltage Rating (AC)=63V, Category="Film Capacitors", ComponentLink1Description=https://datasheet.ciiva.com/13404/kem-f3101-r82-540827-13404565.pdf?src-supplier=Mouser, ComponentLink1URL=https://datasheet.ciiva.com/13404/kem-f3101-r82-540827-13404565.pdf?src-supplier=Mouser, Construction=RADIAL, Depth=2.5mm, Dissipation Factor=80%, Height=6.5mm, Height - Seated (Max)=0.26inch, Lead Diameter=0.5mm, Lead Pitch=5mm, Length=7.2mm, Mount="Through Hole,PCB", Packaging=Bulk, Pricing 1="1=0.22000, 10=0.14800, 50=0.09880, 100=0.08400, 500=0.05928, 1000=0.05187, 2500=0.04940, 5000=0.04570 (USD)", Radiation Hardening=No, RoHS=Yes, RoHS Compliant=Yes, Series=R82, Stock 1=3, Supplier 1=Digi-Key, Termination=Radial, Type="General Purpose", Voltage Rating=100V, Voltage Rating (DC)=100V, Width=2.5mm
C19 C20: "CAP CER 22PF 50V C0G/NP0 1210", Case Code (Imperial)=1210, Case Code (Metric)=3225, Manufacturer="Wurth Electronics", Manufacturer Part Number=885012009007, Max Operating Temperature=125°C, Min Operating Temperature=-55°C, Supplier Part Number 1=732-7599-1-ND, Tolerance=5%, Voltage Rating=50V, Capacitance=22pF, Case/Package=1210, Category="Ceramic Capacitors", ComponentLink1Description=https://katalog.we-online.de/pbs/datasheet/885012009007.pdf?src-supplier=Digi-Key, ComponentLink1URL=https://katalog.we-online.de/pbs/datasheet/885012009007.pdf?src-supplier=Digi-Key, Length=0.126inch, Mount="Surface Mount", Packaging="Tape and Reel", Pricing 1="1=0.60000, 10=0.54500, 100=0.48860, 500=0.43222, 1000=0.27160 (USD)", RoHS=Yes, RoHS Compliant=Yes, Stock 1=854, Supplier 1=Digi-Key, Thickness=0.041inch, Width=0.098inch
D1: "Standard LEDs - SMD SMD LED", Case/Package=1206, Color=Red, Forward Current=20mA, Forward Voltage=2V, Lens Color=Colorless, Manufacturer=Everlight, Max Operating Temperature=85°C, Max Power Dissipation=60mW, Min Operating Temperature=-40°C, Package Quantity=2000, Reverse Voltage=5V, Supplier Part Number 1=638-1521SURCS530A3, Category=LEDs, ComponentLink1Description=https://datasheet.ciiva.com/16397/1239103534-9274-16397709.pdf?src-supplier=Future+Electronics, ComponentLink1URL=https://datasheet.ciiva.com/16397/1239103534-9274-16397709.pdf?src-supplier=Future+Electronics, ComponentLink2Description=https://datasheet.ciiva.com/14182/07531189-14182654.pdf?src-supplier=Distrelec, ComponentLink2URL=https://datasheet.ciiva.com/14182/07531189-14182654.pdf?src-supplier=Distrelec, ComponentLink3Description=https://datasheet.ciiva.com/2119/15-21surc-s530-xx-tr8-2119437.pdf?src-supplier=Digi-Key, ComponentLink3URL=https://datasheet.ciiva.com/2119/15-21surc-s530-xx-tr8-2119437.pdf?src-supplier=Digi-Key, ComponentLink4Description=https://datasheet.ciiva.com/12401/1521surcs530a3tr8-195649-12401374.pdf?src-supplier=Mouser, ComponentLink4URL=https://datasheet.ciiva.com/12401/1521surcs530a3tr8-195649-12401374.pdf?src-supplier=Mouser, ComponentLink5Description=https://datasheet.ciiva.com/26925/getdatasheetpartid-761151-26925787.pdf?src-supplier=Verical, ComponentLink5URL=https://datasheet.ciiva.com/26925/getdatasheetpartid-761151-26925787.pdf?src-supplier=Verical, Depth=1.5mm, Dominant Wavelength=624nm, Height=1mm, Illumination Color=Red, Lead Free="Lead Free", Length=3.2mm, Lens Style=Diffused,Colorless,Rectangular,Clear, Lens Transparency=Clear, Luminous Intensity=54mcd, Manufacturer Part Number=15-21SURC/S530-A3/TR8, Mount="Surface Mount", Number of Elements=1, Number of LEDs=1, Number of Pins=2, Packaging="Tape and Reel", Power Dissipation=60mW, Power Rating=60mW, Pricing 1="1=0.38000, 10=0.20300, 50=0.20300, 100=0.10700, 1000=0.07200, 10000=0.04800 (USD)", Radiation Hardening=No, RoHS=Yes, RoHS Compliant=Yes, Series=-, Stock 1=1500, Supplier 1=Mouser, Test Current=20mA, Viewing Angle=140°, Width=1.5mm
D2 D3 D4 D5 D6 D7 D8: Manufacturer="Taiwan Semiconductor", Manufacturer Part Number="MMBD4148 RFG", Supplier Part Number 1=821-MMBD4148RFG, Pricing 1="1=0.22000, 10=0.19000, 50=0.19000, 100=0.12600, 1000=0.04200, 10000=0.02700 (USD)", RoHS=Yes, RoHS Compliant=Yes, Stock 1=5996, Supplier 1=Mouser
J1: "KLDHCX-0202-AC-1", Manufacturer=Kycon, Supplier Part Number 1=2092-KLDHCX-0202-AC-1-ND, Manufacturer Part Number=KLDHCX-0202-AC-1, Pricing 1="1=0.82000, 10=0.71900, 25=0.67680, 50=0.64860, 100=0.62040, 250=0.56400, 500=0.50760, 1000=0.45120, 2500=0.40890 (USD)", RoHS=No, Stock 1=484, Supplier 1=Digi-Key
J2 J3 J4: Package=None, Availability=Unavailable, MF="{'manufacturer': u'Samtec'}", MP=TSW-101-24-T-S, Price=None
P1 P2 P3 P4 P5: "Header, 2-Pin", LatestRevisionDate=17-Jul-2002, LatestRevisionNote="Re-released for DXP Platform.", Publisher="Altium Limited"
P6: library part "Header 2", "Header, 2-Pin", LatestRevisionDate=17-Jul-2002, LatestRevisionNote="Re-released for DXP Platform.", Publisher="Altium Limited"
P7: library part "Header 6", "Header, 6-Pin", LatestRevisionDate=17-Jul-2002, LatestRevisionNote="Re-released for DXP Platform.", Publisher="Altium Limited"
P8: "Header, 7-Pin", LatestRevisionDate=17-Jul-2002, LatestRevisionNote="Re-released for DXP Platform.", Publisher="Altium Limited"
Q1 Q2 Q3 Q4 Q5: "POWER MOSFET", Case/Package=TO-220, Continuous Drain Current (ID)=55A, Drain to Source Breakdown Voltage=60V, Drain to Source Resistance=14mR, Drain-source On Resistance-Max=18mR, Gate to Source Voltage (Vgs)=16V, Input Capacitance=1.7nF, Manufacturer=STMicroelectronics, Max Operating Temperature=175°C, Max Power Dissipation=95W, Min Operating Temperature=-55°C, Package Quantity=50, Supplier Part Number 1=497-6742-5-ND, Threshold Voltage=1.7V, Category=MOSFETs, ComponentLink1Description=https://datasheet.ciiva.com/938/cd00002690-938896.pdf?src-supplier=Digi-Key, ComponentLink1URL=https://datasheet.ciiva.com/938/cd00002690-938896.pdf?src-supplier=Digi-Key, ComponentLink2Description=https://datasheet.ciiva.com/22655/129279-22655977.pdf?src-supplier=Element14, ComponentLink2URL=https://datasheet.ciiva.com/22655/129279-22655977.pdf?src-supplier=Element14, ComponentLink3Description=https://datasheet.ciiva.com/16286/cd00002690-16286844.pdf?src-supplier=Future+Electronics, ComponentLink3URL=https://datasheet.ciiva.com/16286/cd00002690-16286844.pdf?src-supplier=Future+Electronics, Current Rating=55A, Drain to Source Voltage (Vdss)=60V, Element Configuration=Single, Fall Time=20ns, Height=9.15mm, Lead Free="Lead Free", Length=10.4mm, Manufacturer Part Number=STP55NF06L, Mount="Through Hole", Nominal Vgs=1.7V, Number of Elements=1, Number of Pins=3, On-State Resistance=18mR, Packaging=Rail/Tube, Polarity=N-CHANNEL, Power Dissipation=95W, Pricing 1="1=1.73000, 10=1.55200, 25=1.46440, 100=1.24760, 500=1.02506, 1000=0.93188 (USD)", Radiation Hardening=No, Rds On Max=18mR, REACH SVHC="No SVHC", Rise Time=100ns, RoHS=Yes, RoHS Compliant=Yes, Series=STripFET™, Stock 1=1903, Supplier 1=Digi-Key, Turn-Off Delay Time=40ns, Turn-On Delay Time=20ns, Voltage Rating (DC)=60V, Weight=0.01lb, Width=4.6mm
Q6 Q7 Q8 Q9 Q10: "ON SEMICONDUCTOR - BC846BWT1G - Bipolar (BJT) Single Transistor, General Purpose, NPN, 65 V, 100 MHz, 150 mW, 100 mA, 100 hFE", Case/Package=SC, Collector Base Voltage (VCBO)=80V, Collector Emitter Breakdown Voltage=65V, Collector Emitter Saturation Voltage=600mV, Current Rating=100mA, Emitter Base Voltage (VEBO)=6V, Frequency=100MHz, Manufacturer="ON Semiconductor", Max Operating Temperature=150°C, Max Power Dissipation=150mW, Min Operating Temperature=-55°C, Package Quantity=1, Supplier Part Number 1=BC846BWT1GOSCT-ND, Category=BJTs, Collector Emitter Voltage (VCEO)=65V, Collector-emitter Voltage-Max=600mV, ComponentLink1Description=https://datasheet.ciiva.com/1261/bc846awt1-d-1261088.pdf?src-supplier=Newark, ComponentLink1URL=https://datasheet.ciiva.com/1261/bc846awt1-d-1261088.pdf?src-supplier=Newark, ComponentLink2Description=https://datasheet.ciiva.com/30480/0900766b812769a2-30480624.pdf?src-supplier=RSComponents, ComponentLink2URL=https://datasheet.ciiva.com/30480/0900766b812769a2-30480624.pdf?src-supplier=RSComponents, ComponentLink3Description=https://datasheet.ciiva.com/15139/getdatasheetpartid-110048-15139274.pdf?src-supplier=Verical, ComponentLink3URL=https://datasheet.ciiva.com/15139/getdatasheetpartid-110048-15139274.pdf?src-supplier=Verical, ComponentLink4Description=https://datasheet.ciiva.com/976/bc846awt1-d-976449.pdf?src-supplier=Digi-Key, ComponentLink4URL=https://datasheet.ciiva.com/976/bc846awt1-d-976449.pdf?src-supplier=Digi-Key, ComponentLink5Description=https://datasheet.ciiva.com/976/bc846awt1-d-976450.pdf?src-supplier=Digi-Key, ComponentLink5URL=https://datasheet.ciiva.com/976/bc846awt1-d-976450.pdf?src-supplier=Digi-Key, ComponentLink6Description=https://datasheet.ciiva.com/976/bc846awt1-d-976451.pdf?src-supplier=Digi-Key, ComponentLink6URL=https://datasheet.ciiva.com/976/bc846awt1-d-976451.pdf?src-supplier=Digi-Key, ComponentLink7Description=https://datasheet.ciiva.com/11204/bc846awt1-d-11204342.pdf?src-supplier=Avnet, ComponentLink7URL=https://datasheet.ciiva.com/11204/bc846awt1-d-11204342.pdf?src-supplier=Avnet, ComponentLink8Description=https://datasheet.ciiva.com/11197/bc846awt1-d-11197543.pdf?src-supplier=Avnet, ComponentLink8URL=https://datasheet.ciiva.com/11197/bc846awt1-d-11197543.pdf?src-supplier=Avnet, ComponentLink9Description=https://datasheet.ciiva.com/25996/bc846awt1-d-25996743.pdf?src-supplier=Avnet+Europe, ComponentLink9URL=https://datasheet.ciiva.com/25996/bc846awt1-d-25996743.pdf?src-supplier=Avnet+Europe, ComponentLink10Description=https://datasheet.ciiva.com/22664/1907697-22664107.pdf?src-supplier=Element14, ComponentLink10URL=https://datasheet.ciiva.com/22664/1907697-22664107.pdf?src-supplier=Element14, Contact Plating=Tin,Matte, Element Configuration=Single, Gain Bandwidth Product=100MHz, Halogen Free="Halogen Free", Height=0.9mm, hFE Min=150, Lead Free="Lead Free", Length=2.2mm, Manufacturer Part Number=BC846BWT1G, Max Breakdown Voltage=65V, Max Collector Current=100mA, Max Frequency=100MHz, Number of Elements=1, Number of Pins=3, Packaging="Tape and Reel", Polarity=NPN, Power Dissipation=150mW, Pricing 1="1=0.14000, 10=0.13200, 25=0.12600, 100=0.07200, 500=0.04430, 1000=0.03021 (USD)", Radiation Hardening=No, REACH SVHC="No SVHC", RoHS=Yes, RoHS Compliant=Yes, Series=-, Stock 1=15423, Supplier 1=Digi-Key, Transition Frequency=100MHz, Voltage Rating (DC)=65V, Width=1.35mm
R1 R9 R30 R47 R48 R49: "RES SMD 10K OHM 1/4W 0604 WIDE", Case Code (Imperial)=0406, Case Code (Metric)=1016, Case/Package=Molded, Manufacturer=Vishay, Manufacturer Part Number=MCW0406MD1002BP100, Max Operating Temperature=155°C, Min Operating Temperature=-55°C, Power Rating=250mW, Resistor Type="Thin Film", Supplier Part Number 1=31W9016, Temperature Coefficient=25ppm/°C, Tolerance=0.1%, Voltage Rating=50V, Category="Chip SMD Resistors", ComponentLink1Description=http://www.farnell.com/datasheets/2046107.pdf?src-supplier=Farnell, ComponentLink1URL=http://www.farnell.com/datasheets/2046107.pdf?src-supplier=Farnell, ComponentLink2Description=http://www.mouser.com/ds/2/427/mcw406atpre-111221.pdf?src-supplier=Mouser, ComponentLink2URL=http://www.mouser.com/ds/2/427/mcw406atpre-111221.pdf?src-supplier=Mouser, ComponentLink3Description=http://components.arrow.com/part/dataview/53344020S9999208N6892?src-supplier=Arrow+Electronics, ComponentLink3URL=http://components.arrow.com/part/dataview/53344020S9999208N6892?src-supplier=Arrow+Electronics, ComponentLink4Description=http://www.farnell.com/datasheets/2046107.pdf?src-supplier=Element14, ComponentLink4URL=http://www.farnell.com/datasheets/2046107.pdf?src-supplier=Element14, ComponentLink5Description=http://www.vishay.com/docs/28847/mcw406atpre.pdf?src-supplier=Digi-Key, ComponentLink5URL=http://www.vishay.com/docs/28847/mcw406atpre.pdf?src-supplier=Digi-Key, ComponentLink6Description=http://www.vishay.com/docs/28847/mcw406atpre.pdf?src-supplier=Avnet, ComponentLink6URL=http://www.vishay.com/docs/28847/mcw406atpre.pdf?src-supplier=Avnet, Contact Plating=Tin, Depth=1.5mm, Height=0.3mm, Lead Free="Lead Free", Length=1.6mm, Military Standard=Not, Packaging="Tape and Reel", Pricing 1="1000=0.44000 (USD)", REACH SVHC=Unknown, Resistance=10kR, RoHS=Yes, Supplier 1=Newark, Voltage Rating (DC)=50V, Width=1mm
R2 R3 R4 R42 R43: "Res Thin Film 1206 1M Ohm 0.1% 0.25W(1/4W) ±25ppm/C Molded SMD Automotive Paper T/R", Case Code (Imperial)=1206, Case Code (Metric)=3216, Manufacturer="Vishay Dale", Manufacturer Part Number=TNPW12061M00BEEA, Max Operating Temperature=125°C, Max Power Dissipation=250mW, Min Operating Temperature=-55°C, Package Quantity=5000, Resistance=1MR, Resistance Tolerance=0.1%, Resistor Type="Thin Film", Supplier Part Number 1=TNP1.00MACCT-ND, Temperature Coefficient=25ppm/°C, Voltage Rating=200V, Case/Package=1206, Category="Chip SMD Resistors", ComponentLink1Description=https://datasheet.ciiva.com/2484/tnpw-e3-2484754.pdf?src-supplier=Digi-Key, ComponentLink1URL=https://datasheet.ciiva.com/2484/tnpw-e3-2484754.pdf?src-supplier=Digi-Key, ComponentLink2Description=https://datasheet.ciiva.com/2484/tnpw-e3-2484755.pdf?src-supplier=Digi-Key, ComponentLink2URL=https://datasheet.ciiva.com/2484/tnpw-e3-2484755.pdf?src-supplier=Digi-Key, ComponentLink3Description=https://datasheet.ciiva.com/2484/tnpw-e3-2484756.pdf?src-supplier=Digi-Key, ComponentLink3URL=https://datasheet.ciiva.com/2484/tnpw-e3-2484756.pdf?src-supplier=Digi-Key, ComponentLink4Description=https://datasheet.ciiva.com/22675/1599293-22675126.pdf?src-supplier=Element14, ComponentLink4URL=https://datasheet.ciiva.com/22675/1599293-22675126.pdf?src-supplier=Element14, ComponentLink5Description=https://datasheet.ciiva.com/16757/70201627-16757642.pdf?src-supplier=Allied+Electronics, ComponentLink5URL=https://datasheet.ciiva.com/16757/70201627-16757642.pdf?src-supplier=Allied+Electronics, ComponentLink6Description=https://datasheet.ciiva.com/46383/1599293-46383851.pdf?src-supplier=Element14, ComponentLink6URL=https://datasheet.ciiva.com/46383/1599293-46383851.pdf?src-supplier=Element14, Construction=Rectangular, Contact Plating=Tin, Depth=1.6mm, Features="Moisture Resistant,Automotive AEC-Q200,Anti-Sulfur", Height=0.55mm, Lead Free="Lead Free", Length=3.2mm, Military Standard=Not, Mount="Surface Mount", Number of Terminations=2, Packaging="Tape and Reel", Power Rating=250mW, Pricing 1="1=0.72000, 10=0.62700, 100=0.43700, 1000=0.25650, 2500=0.25270 (USD)", Radiation Hardening=No, REACH SVHC=Unknown, RoHS=Yes, RoHS Compliant=Yes, Series=TNPW, Size Code=1206, Stock 1=47810, Supplier 1=Digi-Key, Technology="THIN FILM", Termination=SMD/SMT, Tolerance=0.1%, Voltage Rating (DC)=200V, Width=1.6mm
R5 R12 R22 R45: "100Ω ±0.1%  0.25W"
R6 R10 R11 R15 R23 R44: "RES SMD 10K OHM 0.1% 1/4W 0805", Case Code (Imperial)=0805, Case Code (Metric)=2012, Manufacturer=Panasonic, Manufacturer Part Number=ERJ-PB6B1002V, Max Operating Temperature=155°C, Max Power Dissipation=250mW, Min Operating Temperature=-55°C, Resistance=10kR, Resistor Type="Thick Film", Supplier Part Number 1=667-ERJ-PB6B1002V, Temperature Coefficient=50ppm/°C, Tolerance=0.1%, Case/Package=0805, Category="Chip SMD Resistors", ComponentLink1Description=https://industrial.panasonic.com/cdbs/www-data/pdf/RDM0000/DMM0000COL5.pdf?src-supplier=Digi-Key, ComponentLink1URL=https://industrial.panasonic.com/cdbs/www-data/pdf/RDM0000/DMM0000COL5.pdf?src-supplier=Digi-Key, ComponentLink2Description=https://industrial.panasonic.com/sa/system/files/data/download/catalog/id_fixed-resistors_e_2.pdf?src-supplier=Digi-Key, ComponentLink2URL=https://industrial.panasonic.com/sa/system/files/data/download/catalog/id_fixed-resistors_e_2.pdf?src-supplier=Digi-Key, Features="Automotive AEC-Q200", Height - Seated (Max)=0.028inch, Length=0.079inch, Number of Terminations=2, Packaging="Tape and Reel", Pricing 1="1=0.27000, 10=0.19900, 50=0.15600, 100=0.09100, 1000=0.04700, 10000=0.03500 (USD)", RoHS=Yes, Stock 1=10409, Supplier 1=Mouser, Width=0.049inch
R7 R18: "BOURNS         3296P-1-203LF            TRIMMER, 25 TURN 20K", Color=Blue, Manufacturer=Bourns, Manufacturer Part Number=3296P-1-203LF, Max Operating Temperature=125°C, Max Power Dissipation=500mW, Min Operating Temperature=-55°C, Package Quantity=50, Resistance=20kR, Resistance Tolerance=10%, Resistor Type=Cermet, Temperature Coefficient=100ppm/°C, Category="Variable Resistors and Potentiometers", ComponentLink1Description=https://datasheet.ciiva.com/1570/3296-1570384.pdf?src-supplier=Newark, ComponentLink1URL=https://datasheet.ciiva.com/1570/3296-1570384.pdf?src-supplier=Newark, ComponentLink2Description=https://datasheet.ciiva.com/11832/0900766b8069ccf4-11832206.pdf?src-supplier=RSComponents, ComponentLink2URL=https://datasheet.ciiva.com/11832/0900766b8069ccf4-11832206.pdf?src-supplier=RSComponents, ComponentLink3Description=https://datasheet.ciiva.com/29190/447270-da-01-en-trimmer-tht3296p-1-203lf-20-k-0-5w-29190277.pdf?src-supplier=Conrad, ComponentLink3URL=https://datasheet.ciiva.com/29190/447270-da-01-en-trimmer-tht3296p-1-203lf-20-k-0-5w-29190277.pdf?src-supplier=Conrad, ComponentLink4Description=https://datasheet.ciiva.com/2158/3296-2158304.pdf?src-supplier=Digi-Key, ComponentLink4URL=https://datasheet.ciiva.com/2158/3296-2158304.pdf?src-supplier=Digi-Key, ComponentLink5Description=https://datasheet.ciiva.com/8088/3296-8088855.pdf?src-supplier=Avnet, ComponentLink5URL=https://datasheet.ciiva.com/8088/3296-8088855.pdf?src-supplier=Avnet, ComponentLink6Description=https://datasheet.ciiva.com/14173/ew3296-dat-e-14173049.pdf?src-supplier=Distrelec, ComponentLink6URL=https://datasheet.ciiva.com/14173/ew3296-dat-e-14173049.pdf?src-supplier=Distrelec, ComponentLink7Description=https://datasheet.ciiva.com/16715/70153578-16715724.pdf?src-supplier=Allied+Electronics, ComponentLink7URL=https://datasheet.ciiva.com/16715/70153578-16715724.pdf?src-supplier=Allied+Electronics, ComponentLink8Description=https://datasheet.ciiva.com/1131/1815117-1131230.pdf?src-supplier=Element14, ComponentLink8URL=https://datasheet.ciiva.com/1131/1815117-1131230.pdf?src-supplier=Element14, Depth=11.55mm, Height=0.19inch, Lead Free="Lead Free", Length=9.53mm, Military Standard=Not, Mount="Through Hole,Panel,PCB", Number of Turns=25, Packaging=Rail/Tube, Power Rating=500mW, Pricing 1="100=1.67000, 500=1.31000 (USD)", Radiation Hardening=No, REACH SVHC="No SVHC", RoHS=Yes, RoHS Compliant=Yes, Series=3296, Stock 1=729, Supplier 1=Newark, Taper=Linear, Technology=CERMET, Termination=Pin, Tolerance=10%, Weight=0.03oz, Width=0.395inch
R8 R16 R24 R25 R26 R27: "2.2K ±0.1%  0.25W"
R13: "47K ±0.1% 0.25W"